# Altium PCB PCB.PcbDoc
Units mm, origin at the board's own origin, x right, y up, seen from the top; angles counter-clockwise.
Board outline 55 x 45 mm, 2 copper layers (Top Layer, Bottom Layer), stack 1.56 mm thick; 29 components, 21 nets, 92 pads, 0 vias.
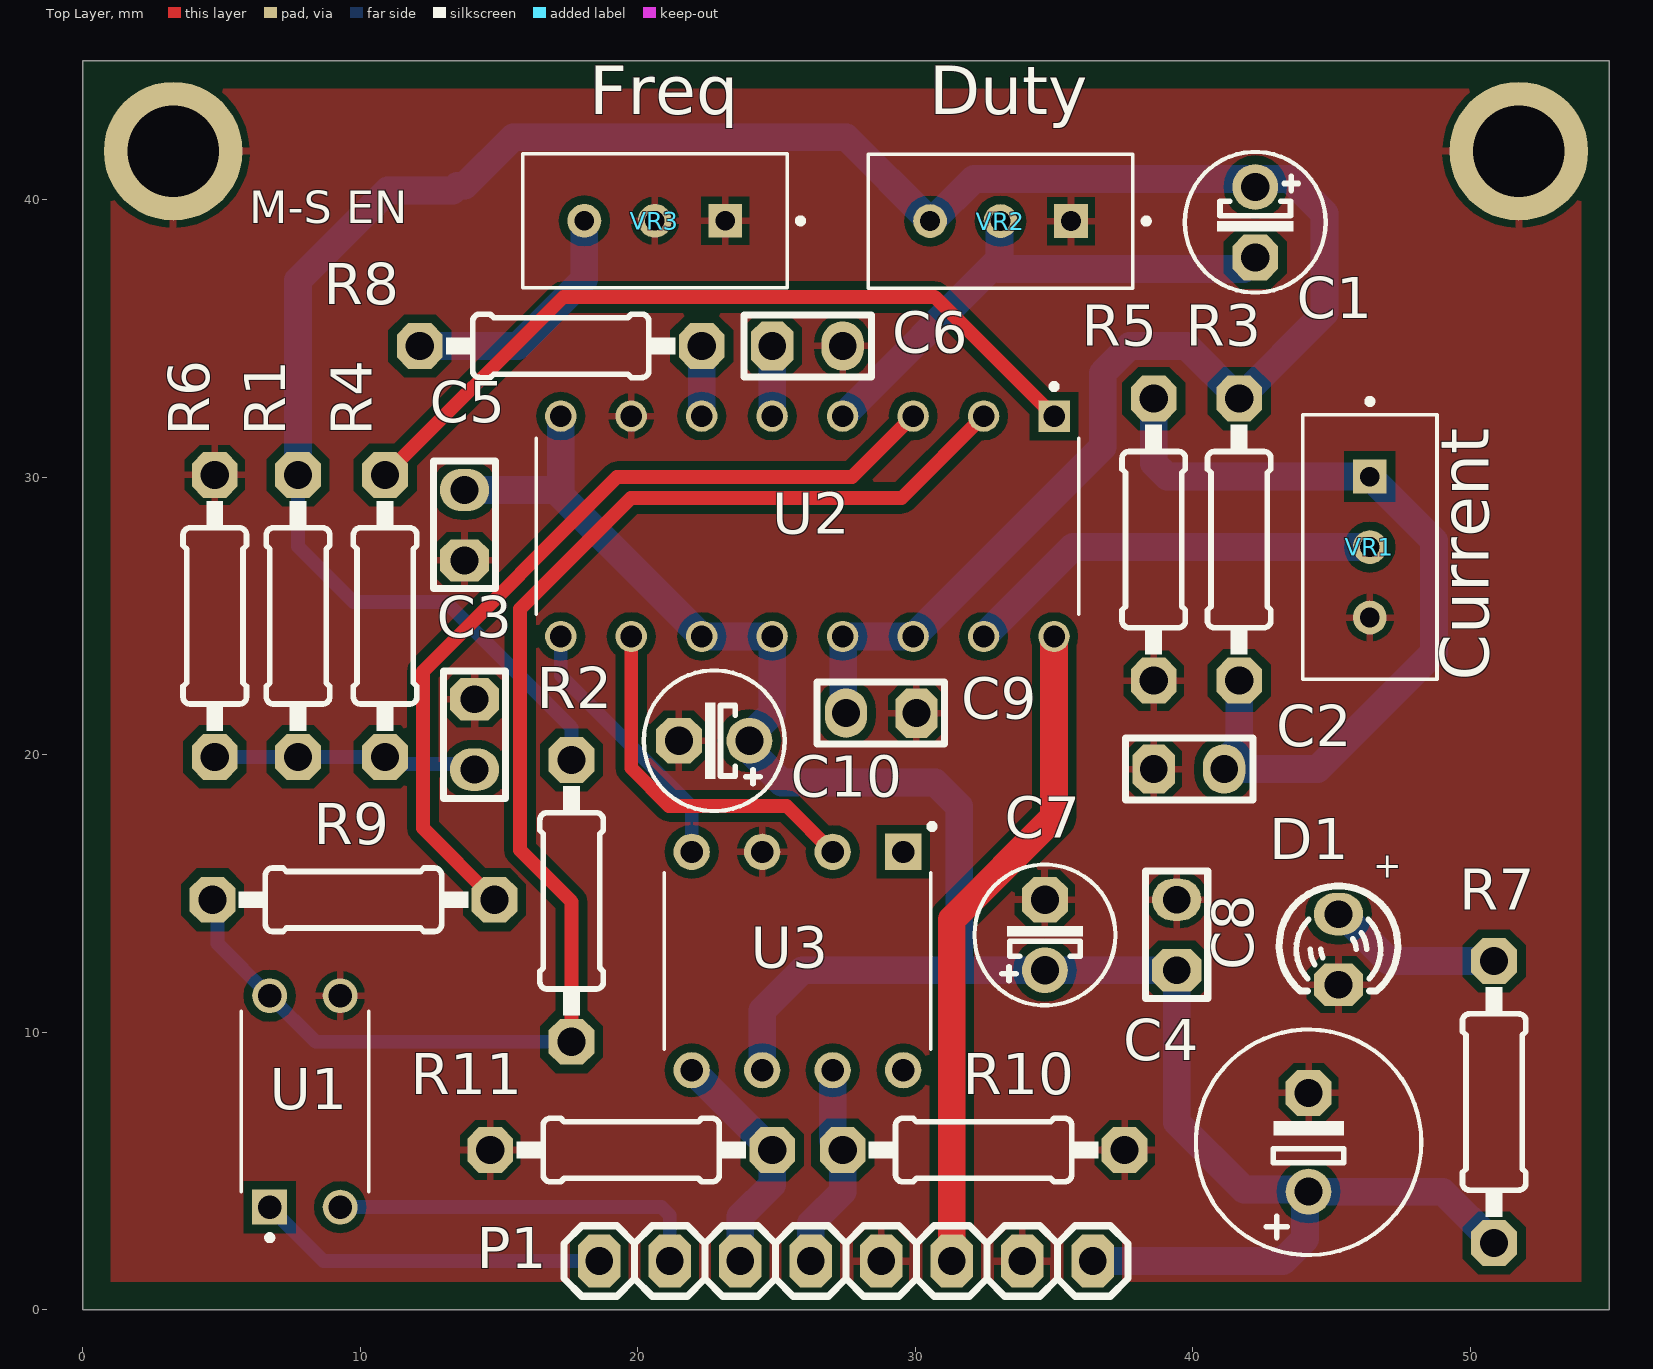
[diagram p0: Top Layer view]
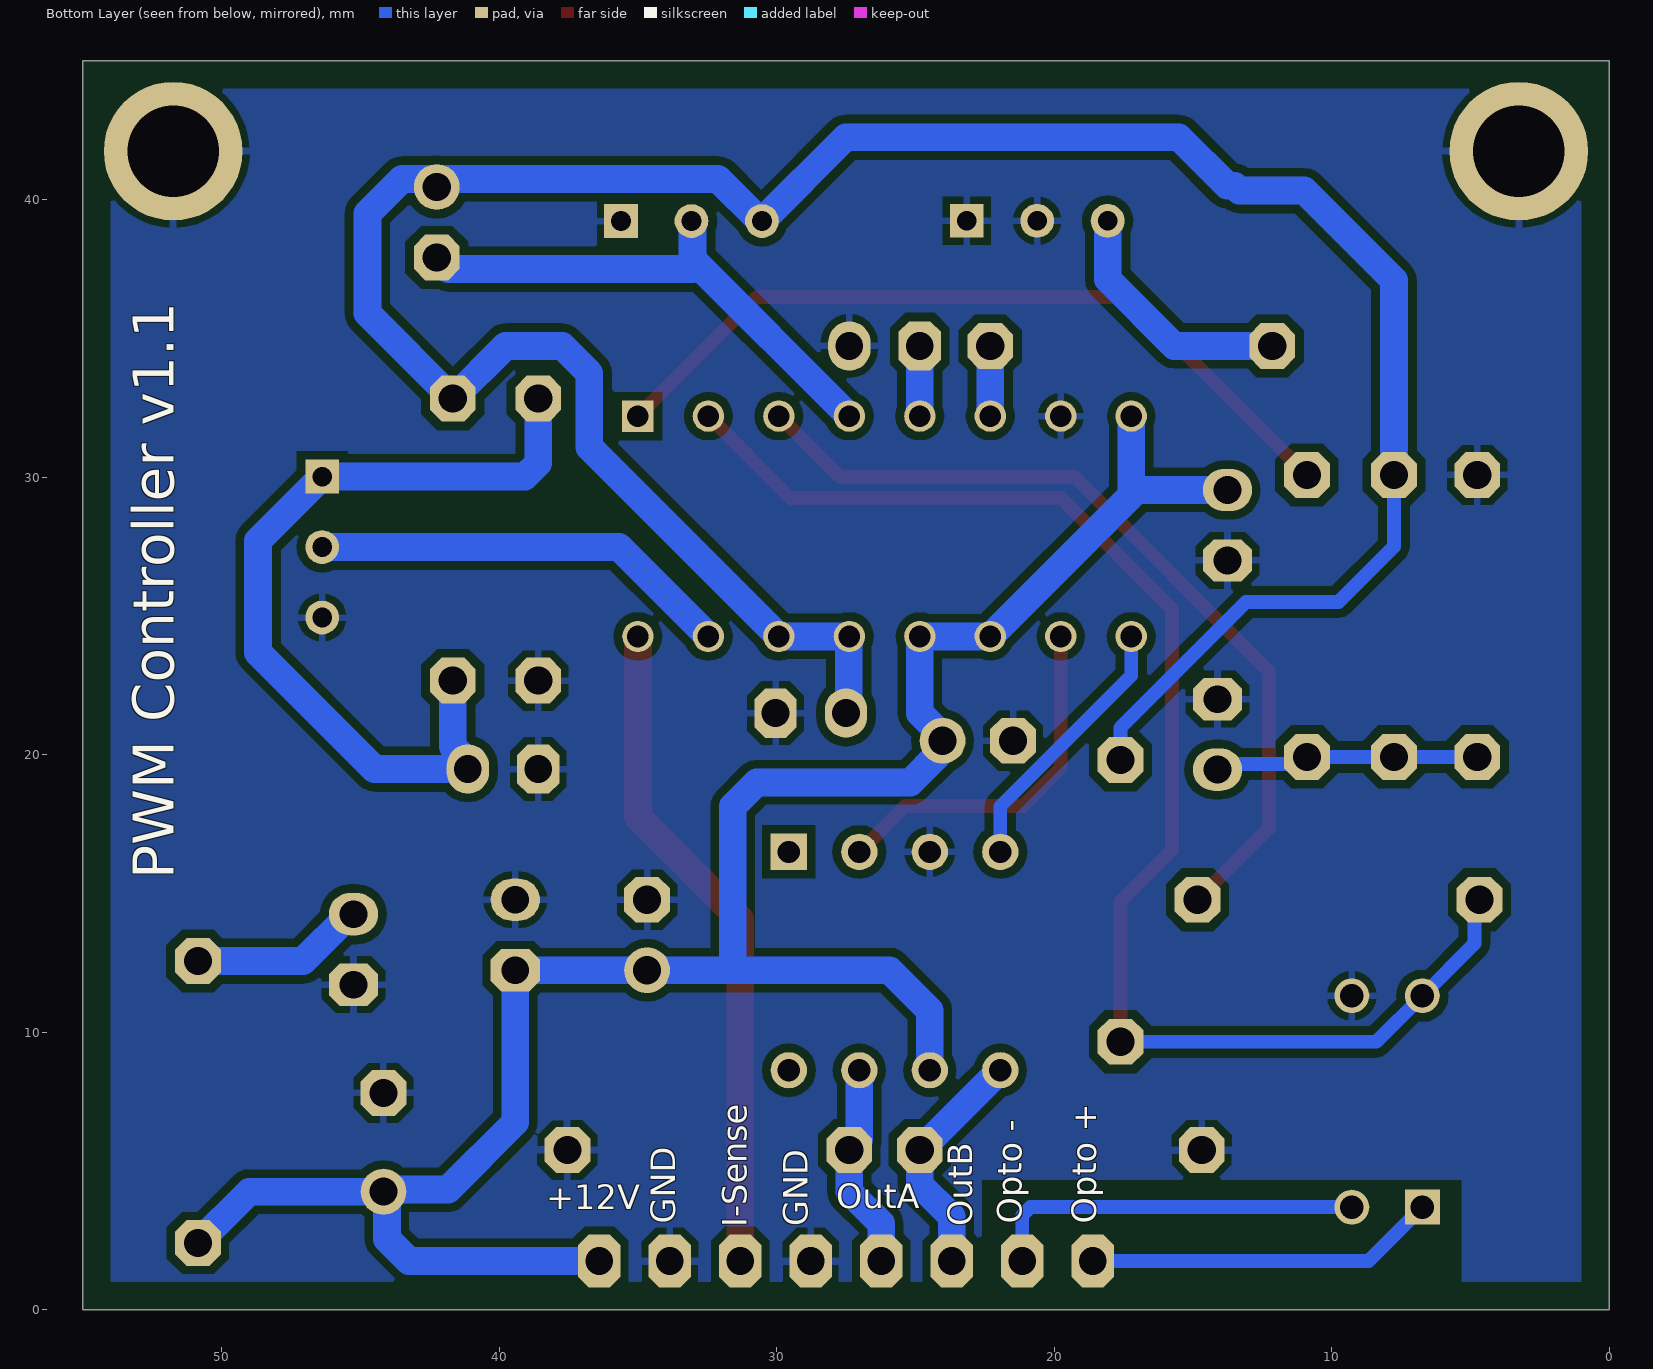
[diagram p1: Bottom Layer view, seen from below]
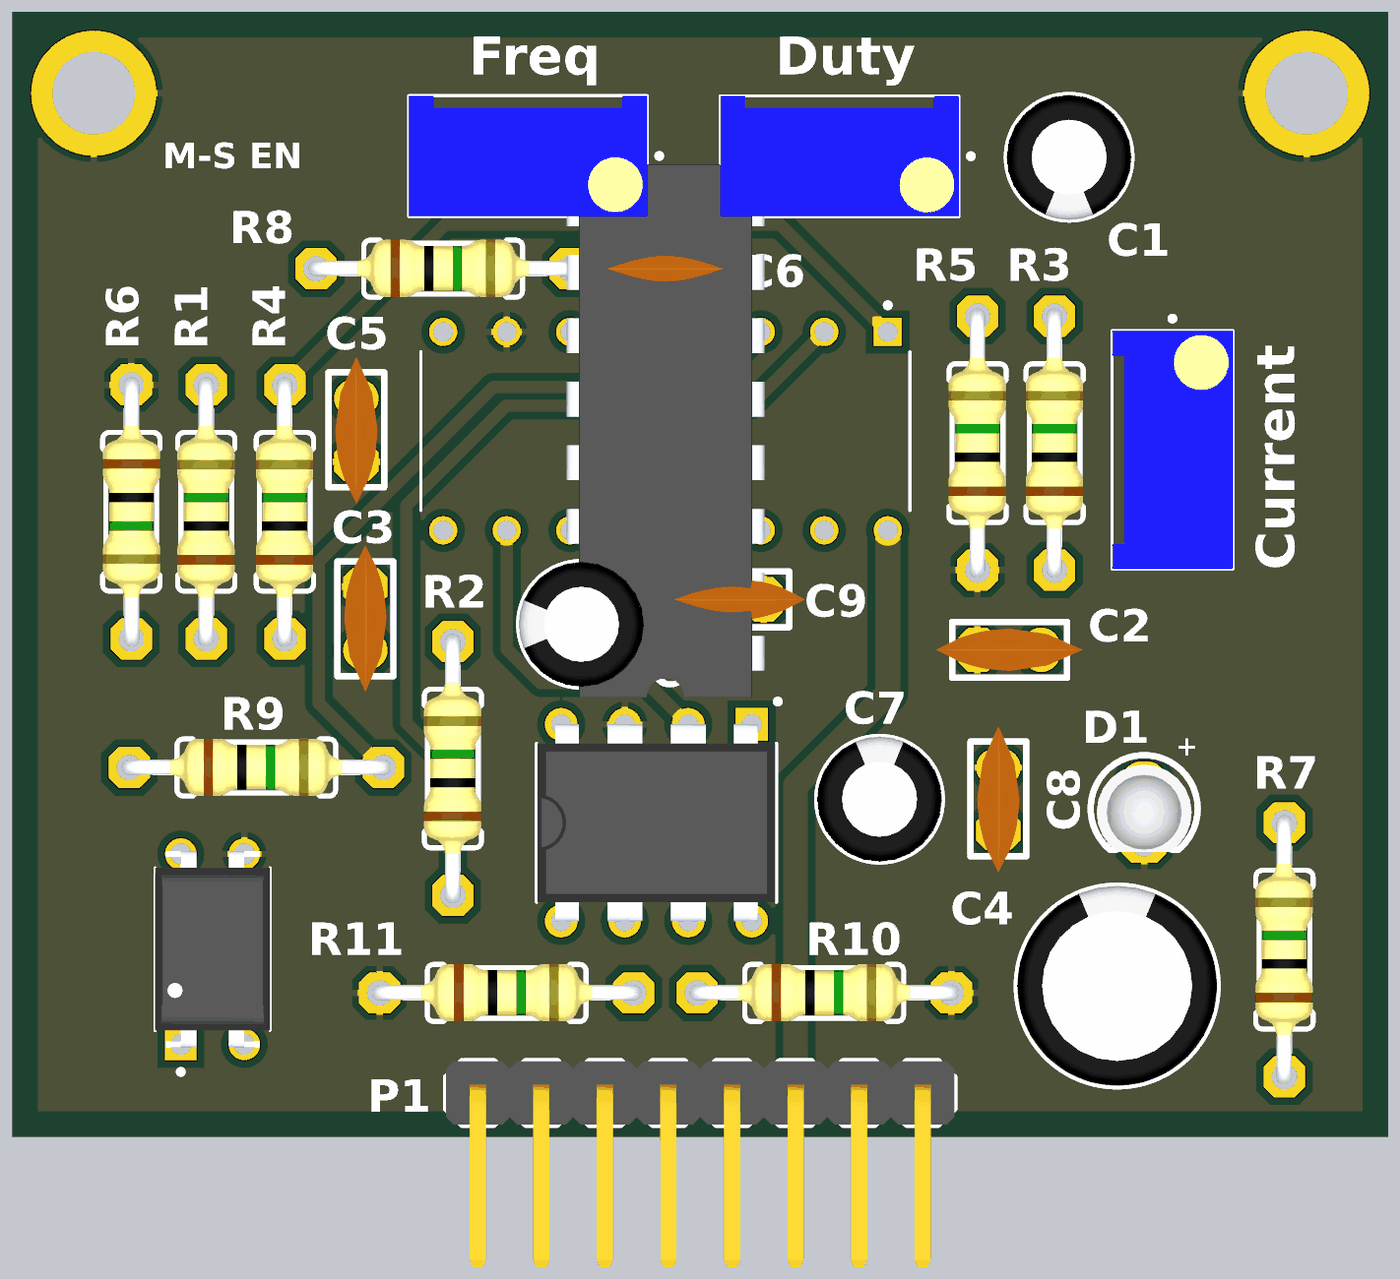
[diagram p2: 3D render of the assembled board from above, using the file's embedded part models]

## Layer stack, top to bottom
Top Solder: solder mask 0.02, Solder Resist, Dk 3.5
Top Layer: signal copper 0.03
Dielectric 1: dielectric 1.5, FR-4, Dk 4.8
Bottom Layer: signal copper 0.03
Bottom Solder: solder mask 0.02, Solder Resist, Dk 3.5

## Board outline
0,0 55,0 55,45 0,45

## Design rules (kind name [scope] priority, off if disabled: settings)
AcuteAngle [All] p1: minimum=6.00000000000000E+0001 checktracksonly=TRUE
AssemblyTestPointUsage [(not InNetClass('NOTESTPOINTS'))] p1: allowmultiple=TRUE
AssemblyTestPointUsage AssemblyTestPointUsageN [InNetClass('NOTESTPOINTS')] p2: valid=2 allowmultiple=TRUE
AssemblyTestpoint [All] p1: testpointundercomponent=TRUE minsize=0.8 maxsize=2 preferedsize=1 minholesize=0 maxholesize=0.35 preferedholesize=0 testpointgrid=1.27 usegrid=FALSE gridoriginx=87.5 gridoriginy=62.5 gridtolerance=0 allowsidetop=TRUE minspacing=2.54 // Zollner
BoardOutlineClearance BoardCopperOutlineClearance [(OnLayer('Top Layer') OR OnLayer('Bottom Layer') )] p1: gap=0.5 ignorepadtopadclearanceinfootprint=FALSE except(1: Poly-OutlineEdge Region-OutlineEdge; 1.5: SMDPad-OutlineEdge THPad-OutlineEdge)
Clearance PadToViaClearance [IsVia and not IsComponentVia vs IsPad] p1: gap=0.025 ignorepadtopadclearanceinfootprint=TRUE
Clearance "Clearance NOTSELV-SELV" [InNetClass('NOTSELV') vs NOT InNetClass('NOTSELV')] p2: gap=6 ignorepadtopadclearanceinfootprint=FALSE // according to previous calio PCB
Clearance "Clearance (FAB)" [All] p3: gap=0.203 ignorepadtopadclearanceinfootprint=TRUE except(0.305: Arc-Poly Track-Poly SMDPad-Poly THPad-Poly Via-Poly Fill-Poly Poly-Poly)
ComponentClearance ComponentClearance_NetTie [((ObjectKind = 'Component') And (ComponentType = 'Net Tie')) Or (Footprint = 'StarPoint') Or (Footprint like 'NetTieVia*')] p1: gap=-3.81 collisioncheckmode=3 verticalgap=-3.81 showdistances=FALSE
ComponentClearance [All] p2: gap=0.254 collisioncheckmode=3 verticalgap=0.254 showdistances=FALSE
DiffPairsRouting [All] p1: maxlimit=1.27 minlimit=0.203 mostfreqgap=0.203 toplayer_minwidth=0.152 toplayer_maxwidth=2.54 toplayer_prefwidth=0.254 bottomlayer_minwidth=0.152 bottomlayer_maxwidth=2.54 bottomlayer_prefwidth=0.254 maxuncoupledlength=12.7
FabricationTestPointUsage [All] p1: valid=2 allowmultiple=FALSE
FabricationTestpoint [All] p1: side=3 testpointundercomponent=TRUE minsize=1.016 maxsize=2.54 preferedsize=1.524 minholesize=0 maxholesize=1.016 preferedholesize=0.813 testpointgrid=0.025 allowsidetop=TRUE allowsidebottom=TRUE usegrid=FALSE gridtolerance=0
HoleSize [All] p1: absolutevalues=TRUE maxlimit=6.35 minlimit=0.3 maxpercent=80.000 minpercent=20.000 // Zollner
HoleToHoleClearance HoleToHoleClearance_NetTieVia [InPadClass('NetTieVias') vs InPadClass('NetTieVias')] p1: gap=0 allowstackedmicrovias=TRUE
HoleToHoleClearance [All] p2: gap=0.25 allowstackedmicrovias=TRUE // Zollner
MinimumAnnularRing [All] p1: minimumring=0.15 // PCBWAY
MinimumSolderMaskSliver [All] p1: minsoldermaskwidth=0.2 // Zollner
PlaneClearance PlaneClearance_1 [All] p1: clearance=0.508
PlaneConnect [All] p1: pad.planeconnectstyle=Relief pad.reliefexpansion=0.508 pad.reliefentries=4 pad.reliefconductorwidth=0.254 pad.reliefairgap=0.254 via.planeconnectstyle=Direct via.reliefexpansion=0.508 via.reliefentries=4 via.reliefconductorwidth=0.254 via.reliefairgap=0.254
PolygonConnect [All] p1: thpad.connectstyle=Relief thpad.reliefconductorwidth=0.254 thpad.reliefentries=4 thpad.polygonreliefangle="90 Angle" thpad.airgapwidth=0.254 smdpad.connectstyle=Relief smdpad.reliefconductorwidth=0.254 smdpad.reliefentries=4 smdpad.polygonreliefangle="90 Angle" smdpad.airgapwidth=0.254 via.connectstyle=Direct via.reliefconductorwidth=0.254 via.reliefentries=4 via.polygonreliefangle="90 Angle" via.airgapwidth=0.254
RoutingVias [All] p1: holewidth=0.35 width=0.7 viastyle="Through Hole" minholewidth=0.3 minwidth=0.6 maxholewidth=1.27 maxwidth=1.27
SMDEntry [not IsTestpoint] p1: side=TRUE corner=TRUE anyangle=FALSE
SMDNeckDown [not IsTestpoint] p1: percent=90.000
SMDToCorner [All] p1: distance=10000
SMDToPlane [All] p1: distance=0
ShortCircuit [All vs not IsBoardCutoutRegion] p1: allowed=FALSE
SilkToSolderMaskClearance [IsPad] p1: minsilkscreentomaskgap=0.127 clearancetoexposedcopper=TRUE
SolderMaskExpansion [All] p1: expansion=0.05 // Zollner
SolderMaskExpansion SolderMaskExpansionToHoles [All] p2: expansion=0.1 soldermaskfromhole=TRUE // Zollner
UnRoutedNet [All] p1: checkbadconnections=TRUE
Width [All] p1: maxlimit=12.7 minlimit=0.203 preferedwidth=0.254
16 further rules are at their usual default settings.

## Components (designator, comment, footprint, x,y, rotation, side; value= is the part's Value field where it differs from the comment)
C1 "4.7uF" MY_E2.5-5mm 42.25,39.188 r270 top
C2 "100nF" My_cap100n 39.86,19.48 r0 top
C3 "100nF" My_cap100n 14.11,20.73 r270 top
C4 "220uF" MY_E3.5-8mm 44.17,6.028 r90 top
C5 "100nF" My_cap100n 13.75,28.27 r90 top
C6 "1nF" My_cap100n 26.11,34.73 r0 top
C7 "4.7uF" MY_E2.5-5mm 34.67,13.5 r90 top
C8 "100nF" My_cap100n 39.42,13.5 r90 top
C9 "100nF" My_cap100n 28.77,21.496 r180 top
C10 "4.7uF" MY_E2.5-5mm 22.75,20.5 r180 top
D1 "LED" My_LED3MM 45.25,12.98 r270 top
P1 "Header 8" MY_MA08-1W 27.5,1.75 r180 top locked
R1 "10 kOhms" MY_(0.25w)_0207_10 7.75,25 r90 top value=10k
R2 "10 kOhms" MY_(0.25w)_0207_10 17.61,14.73 r90 top value=10k
R3 "15 kOhms" MY_(0.25w)_0207_10 41.67,27.75 r90 top value=15k
R4 "1 kOhms" MY_(0.25w)_0207_10 10.89,25 r90 top value=1k
R5 "5.6 kOhms" MY_(0.25w)_0207_10 38.59,27.75 r90 top value=5.6k
R6 "10 kOhms" MY_(0.25w)_0207_10 4.75,25 r270 top value=10k
R7 "2.2 kOhms" MY_(0.25w)_0207_10 50.86,7.48 r90 top value=2.2k
R8 "2 kOhms" MY_(0.25w)_0207_10 17.22,34.73 r0 top value=2k
R9 "10 kOhms" MY_(0.25w)_0207_10 9.75,14.77 r0 top value=10k
R10 "10 kOhms" MY_(0.25w)_0207_10 32.46,5.75 r0 top value=10k
R11 "10 kOhms" MY_(0.25w)_0207_10 19.76,5.75 r0 top value=10k
U1 "PC817" DIP762W50P254L495H455Q4 8,7.5 r90 top
U2 "TL494IN" DIP794W45P254L1969H508Q16 26.11,28.23 r270 top
U3 "MIC4427ZN" DIP787W46P254L927H533Q8 25.75,12.56 r270 top
VR1 "10 kOhms" TRIM_3296W-1-502 46.38,27.48 r270 top
VR2 "10 kOhms" TRIM_3296W-1-502 33.07,39.23 r180 top
VR3 "100 kOhms" TRIM_3296W-1-502 20.61,39.24 r180 top

## Footprints (in the part's own frame and the unit in brackets; to place one, negate y for a bottom-side part, rotate by r counter-clockwise, add the part's x,y. Pads: shape width x height; smd on the part's side, far side on the other; paste and mask are expansions set on the pad)
DIP762W50P254L495H455Q4 [mm]
  rect 1.26x1.26 / inner round 1.26 / far side rect 1.26x1.26 hole 0.84: 1(-3.81,1.27)
  round 1.26 hole 0.84: 2(-3.81,-1.27) 3(3.81,-1.27) 4(3.81,1.27)
  silkscreen extent -5.01,-2.3 3.25,2.3, body extent -3.94,-2.3 3.94,2.3, height 4.55
DIP787W46P254L927H533Q8 [mm]
  rect 1.308x1.308 / inner round 1.308 / far side rect 1.308x1.308 hole 0.8: 1(-3.935,3.81)
  round 1.308 hole 0.8: 2(-3.935,1.27) 3(-3.935,-1.27) 4(-3.935,-3.81) 5(3.935,-3.81) 6(3.935,-1.27) 7(3.935,1.27) 8(3.935,3.81)
  silkscreen extent -4.95,-4.8 3.18,4.95, body extent -3.96,-4.75 3.96,4.75, height 5.08
DIP794W45P254L1969H508Q16 [mm]
  rect 1.13x1.13 / inner round 1.13 / far side rect 1.13x1.13 hole 0.78: 1(-3.97,8.89)
  round 1.13 hole 0.78: 2(-3.97,6.35) 3(-3.97,3.81) 4(-3.97,1.27) 5(-3.97,-1.27) 6(-3.97,-3.81) 7(-3.97,-6.35) 8(-3.97,-8.89) 9(3.97,-8.89) 10(3.97,-6.35) 11(3.97,-3.81) 12(3.97,-1.27) 13(3.97,1.27) 14(3.97,3.81) 15(3.97,6.35) 16(3.97,8.89)
  silkscreen extent -5.13,-9.77 3.18,9.77, body extent -3.95,-10.67 3.95,10.67, height 5.08
MY_(0.25w)_0207_10 [mil]
  oct 65x65 hole 40: 1(-200,0) 2(200,0)
  silkscreen extent -163,-45 163,45, body extent -212,-45 212,46, height 96
My_cap100n [mil]
  oct 60x70 hole 39.37: 1(-50,0)
  oval 60x70 hole 39.37: 2(50,0)
  silkscreen extent -90,-44 91,44, body extent -115,-33 115,33, height 245
MY_E2.5-5mm [mil]
  round 65 hole 40: +(-50,0)
  oct 65x65 hole 40: -(50,0)
  silkscreen extent -100,-100 100,100, body extent -98,-98 98,98, height 395
MY_E3.5-8mm [mil]
  round 65 hole 40: +(-70,0)
  oct 65x65 hole 40: -(70,0)
  silkscreen extent -160,-160 160,160, body extent -157,-157 157,157, height 415
My_LED3MM [mil]
  oval 60x70 hole 39.37: A(-50,0)
  oct 60x70 hole 39.37: K(50,0)
  silkscreen extent -90,-84 59,84, body extent -75,-75 63,75, height 217
MY_MA08-1W [mm]
  oct 1.524x1.905 hole 1: 1(-8.89,0) 2(-6.35,0) 3(-3.81,0) 4(-1.27,0) 5(1.27,0) 6(3.81,0) 7(6.35,0) 8(8.89,0)
  silkscreen extent -10.16,-1.27 10.16,1.27, body extent -10.16,-1.27 10.16,7, height 4.33
TRIM_3296W-1-502 [mm]
  rect 1.218x1.218 / inner round 1.218 / far side rect 1.218x1.218 hole 0.71: 1(-2.54,0)
  round 1.218 hole 0.71: 2(0,0) 3(2.54,0)
  silkscreen extent -5.35,-2.41 4.76,2.42, body extent -4.76,-2.41 4.76,2.42, height 11.55

## Part data
C1 C7 C10: library part "Cap Pol", "Polar capacitor", ASiD Part Number=C-AS, Volte=25v
C2 C3 C5 C6 C8 C9: library part "Cap ceramic", "None polar capacitor", ASiD Part Number=C-AS
C4: library part "Cap Pol", "Polar capacitor", ASiD Part Number=C-AS, Volte=25V
D1: "Typical INFRARED GaAs LED", ASiD Part Number=LED-AS
P1: "Header, 8-Pin, Dual row", ASiD Part Number="Header 8-AS"
R1 R2 R3 R4 R5 R6 R7 R8 R9 R10 R11: library part Res, "Standard resistor", ASiD Part Number=Res-AS
U1: library part PC817X3NSZ1B, "Optoisolator Transistor Output - 1 Channel 4-DIP", Package="DIP-4 Sharp Microelectronics", Availability="In Stock", Check_prices=https://www.snapeda.com/parts/PC817X3NSZ1B/Sharp+Microelectronics/view-part/?ref=eda, MF="Sharp Microelectronics", MP=PC817X3NSZ1B, Price=None, Purchase-URL=https://pricing.snapeda.com/search/part/PC817X3NSZ1B/?ref=eda, SnapEDA_Link=https://www.snapeda.com/parts/PC817X3NSZ1B/Sharp+Microelectronics/view-part/?ref=snap
U2: "40V, 0.2A 300KHz PWM controller", Package="PDIP-16 Texas Instruments", Check_prices=https://www.snapeda.com/parts/TL494IN/Texas+Instruments/view-part/?ref=eda, MF="Texas Instruments", MP=TL494IN, SnapEDA_Link=https://www.snapeda.com/parts/TL494IN/Texas+Instruments/view-part/?ref=snap
U3: "IC GATE DRVR LOW-SIDE 8DIP", Mfr_Name="Micrel / Microchip Technology", RefDes=RefDes, Type=Type
VR1 VR2 VR3: library part 3296W-1-502, "NON-RoHS, 3/8 Sq, Thru-Hole, TRIMMER, 5 Kohms, Cermet, 25 Turns, Pwr-Rtg 0.5W", Package="NON STANDARD-3 Bourns", Check_prices=https://www.snapeda.com/parts/3296W-1-502/Bourns/view-part/?ref=eda, MF=Bourns, MP=3296W-1-502, SnapEDA_Link=https://www.snapeda.com/parts/3296W-1-502/Bourns/view-part/?ref=snap

## Free pads (board coordinates)
  round 5 hole 3.3: 1(3.25,41.75) 1(51.75,41.75)
  round 5 on Mech16: 1(3.25,41.75)

## Nets (pads, with @x,y where several pads share a name; then routed paths per layer and width w, separated by ;. In a path a pad name is that pad's centre, name@x,y a point inside that pad or via, vN(x,y) a via of type N, cw(c..) or ccw(c..) an arc to the next point about the centre after c; other vN are vias at no path point)
+12: C4.+ C5.2 C7.+ C8.1 C10.+ P1.1 R7.1 U2.8 U2.11 U2.12 U3.6 | length 81
  Bottom Layer w1: C5.2 17.02,29.54 17.22,29.34 ; U2.8 17.22,29.34 ; U3.6 24.48,10.779 25.931,12.23 31.586,12.23 ; P1.1 43.25,1.75 44.045,2.545 44.045,4.125 C4.+ ; R7.1 49.01,4.25 C4.+ ; 17.22,29.34 U2.11 U2.12 24.84,21.496 24.02,20.676 C10.+ 24.145,20.375 24.145,20.036 25.181,19 30.716,19 31.586,18.13 31.586,12.23 ; 31.586,12.23 C7.+ C8.1 39.42,6.75 41.844,4.325 44.094,4.325 C4.+
CT: C6.1 U2.5 | length 2.5
  Bottom Layer w1: U2.5 C6.1
DEAD_TIME: C1.- U2.4 VR2.2 | length 19.2
  Bottom Layer w1: U2.4 33.028,37.848 ; VR2.2@33.129,39.23 VR2.2 33.028,39.188 33.028,37.848 ; C1.- 41.832,37.5 33.028,37.5 33.028,37.848
GND: C2.1 C3.1 C4.- C5.1 C6.2 C7.- C8.2 C9.1 C10.- D1.K P1.2 P1.4 pad.1@3.25,41.75 pad.1@51.75,41.75 R5.1 R6.1 R10.2 R11.1 U1.3 U2.7 U3.3 VR1.3 VR2.1 VR3.1 VR3.2
I_ADJUST: U2.15 VR1.2 | length 15.3
  Bottom Layer w1: U2.15 35.68,27.48 VR1.2
I_SENSE: P1.3 U2.16 | length 24
  Top Layer w1: P1.3 31.31,14.06 35,17.75 U2.16
INV_INPUT1: R2.1 R9.1 U1.4 U2.2 | length 51.8
  Top Layer w0.5: R2.1 17.61,14.7 15.75,16.56 15.75,25.25 19.75,29.25 29.51,29.25 U2.2
  Bottom Layer w0.5: R9.1 4.845,14.594 4.845,13.195 U1.4 8.39,9.65 R2.1
NetC2_2: C2.2 R3.1 R5.2 VR1.1 | length 30.3
  Bottom Layer w1: R5.2 38.59,30.505 39.074,30.02 VR1.1 48.69,27.71 48.69,23.68 44.49,19.48 C2.2 41.13,19.749 41.67,20.289 R3.1
NetC3_2: C3.2 R1.1 R4.1 R6.2 | length 9.6
  Bottom Layer w0.5: R6.2 R1.1 R4.1 11.154,19.656 13.914,19.656 C3.2
NetD1_A: D1.A R7.2 | length 6.3
  Bottom Layer w1: D1.A 45.377,14.25 47.067,12.56 R7.2
NetR8_1: R8.1 VR3.3 | length 9
  Bottom Layer w1: R8.1 15.669,34.73 18.07,37.131 VR3.3
NetR9_2: R9.2 U2.3 | length 30.8
  Top Layer w0.5: R9.2 12.25,17.35 12.25,23 19.25,30 27.72,30 U2.3
NOINV_INPUT1: R4.2 U2.1 | length 28.6
  Top Layer w0.5: R4.2 17.31,36.5 30.7,36.5 U2.1
OPTO_ANODE: P1.8 U1.1 | length 12.7
  Bottom Layer w0.5: U1.1 8.67,1.75 P1.8
OPTO_CATHODE: P1.7 U1.2 | length 13.6
  Bottom Layer w0.5: U1.2 20.857,3.69 21.15,3.397 P1.7
PWM_IN_A: U2.10 U3.2 | length 13.3
  Top Layer w0.5: U2.10 19.76,19.515 21.125,18.15 25.365,18.15 U3.2
PWM_IN_B: U2.9 U3.4 | length 9.7
  Bottom Layer w0.5: U2.9 17.22,22.85 21.94,18.13 U3.4
PWM_OUT_A: P1.5 R10.1 U3.7 | length 7.5
  Bottom Layer w1: P1.5 26.23,3.1 27.38,4.25 R10.1 27.02,6.11 U3.7
PWM_OUT_B: P1.6 R11.2 U3.5 | length 8.6
  Bottom Layer w1: U3.5 21.952,8.625 24.827,5.75 R11.2 24.84,4.5 23.69,3.35 P1.6
RT: R8.2 U2.6 | length 2.5
  Bottom Layer w1: U2.6 R8.2
VREF: C1.+ C9.2 R1.2 R2.2 R3.2 U2.13 U2.14 VR2.3 | length 96.8
  Bottom Layer w0.5: R1.2 7.75,27.5 9.75,25.5 13.08,25.5 17.61,20.97 R2.2
  Bottom Layer w1: R1.2 7.75,37.096 10.984,40.33 13.33,40.33 13.5,40.5 13.754,40.5 15.504,42.25 27.51,42.25 VR2.3 30.589,39.23 32.109,40.75 41.958,40.75 C1.+ 42.542,40.75 43.5,40.75 44.75,39.5 44.75,35.91 R3.2 39.77,34.73 37.73,34.73 36.75,33.75 36.75,31.09 U2.14 U2.13 27.405,24.235 27.405,21.591 C9.2
pads on no net: U3.1 U3.8

## Polygon pours and split planes (outlines as drawn)
GND on Top Layer "GND_L01_P002" (solid, remove dead copper, pour order 2): 0,0.025 0,45 55,45 55,0 -0.025,0
GND on Bottom Layer "GND_L02_P004" (solid, remove dead copper, pour order 4): 0,0 0,45 55,45 55,0

## Other copper
Bottom Layer:
  pour cut-out: 22.616,0 5.315,0 5.315,4.671 22.616,4.671

## Silkscreen, mask and mechanical layers (free items; w line width, h text height)
Top Overlay:
  text "Freq" at 18.25,42.5 h3
  text "Duty" at 30.5,42.5 h3
  text "M-S EN" at 6,38.75 h2
  text "Current" at 51.25,22.67 h3 r90
  text "+" at 46.5,15.25 h1.54
Bottom Overlay:
  text "PWM Controller v1.1" at 51.25,15.514 h2.54 r270
  text "OutA" at 27.858,3.35 h1.52
  text "+12V" at 38.303,3.31 h1.52
  text "Opto +" at 18.175,3.1 h1.52 r270
  text "Opto -" at 20.857,3.1 h1.52 r270
  text "GND" at 33.342,3.1 h1.52 r270
  text "OutB" at 22.636,3.007 h1.52 r270
  text "GND" at 28.576,3.007 h1.52 r270
  text "I-Sense" at 30.777,2.965 h1.52 r270
Board outline:
  the board outline again, w0.25

## Dimensions
0,0 to 55,-0.5 on PCBM Notes
55,45 to 55,0 on PCBM Notes